# Altium PCB 剥皮器20200614.PCBDOC (part 1 of 3)
Units mm, origin at the board's own origin, x right, y up, seen from the top; angles counter-clockwise.
Board outline 140 x 88 mm, 4 copper layers (Top Layer, MidLayer1, MidLayer2, Bottom Layer); 134 components, 105 nets, 507 pads, 469 vias.
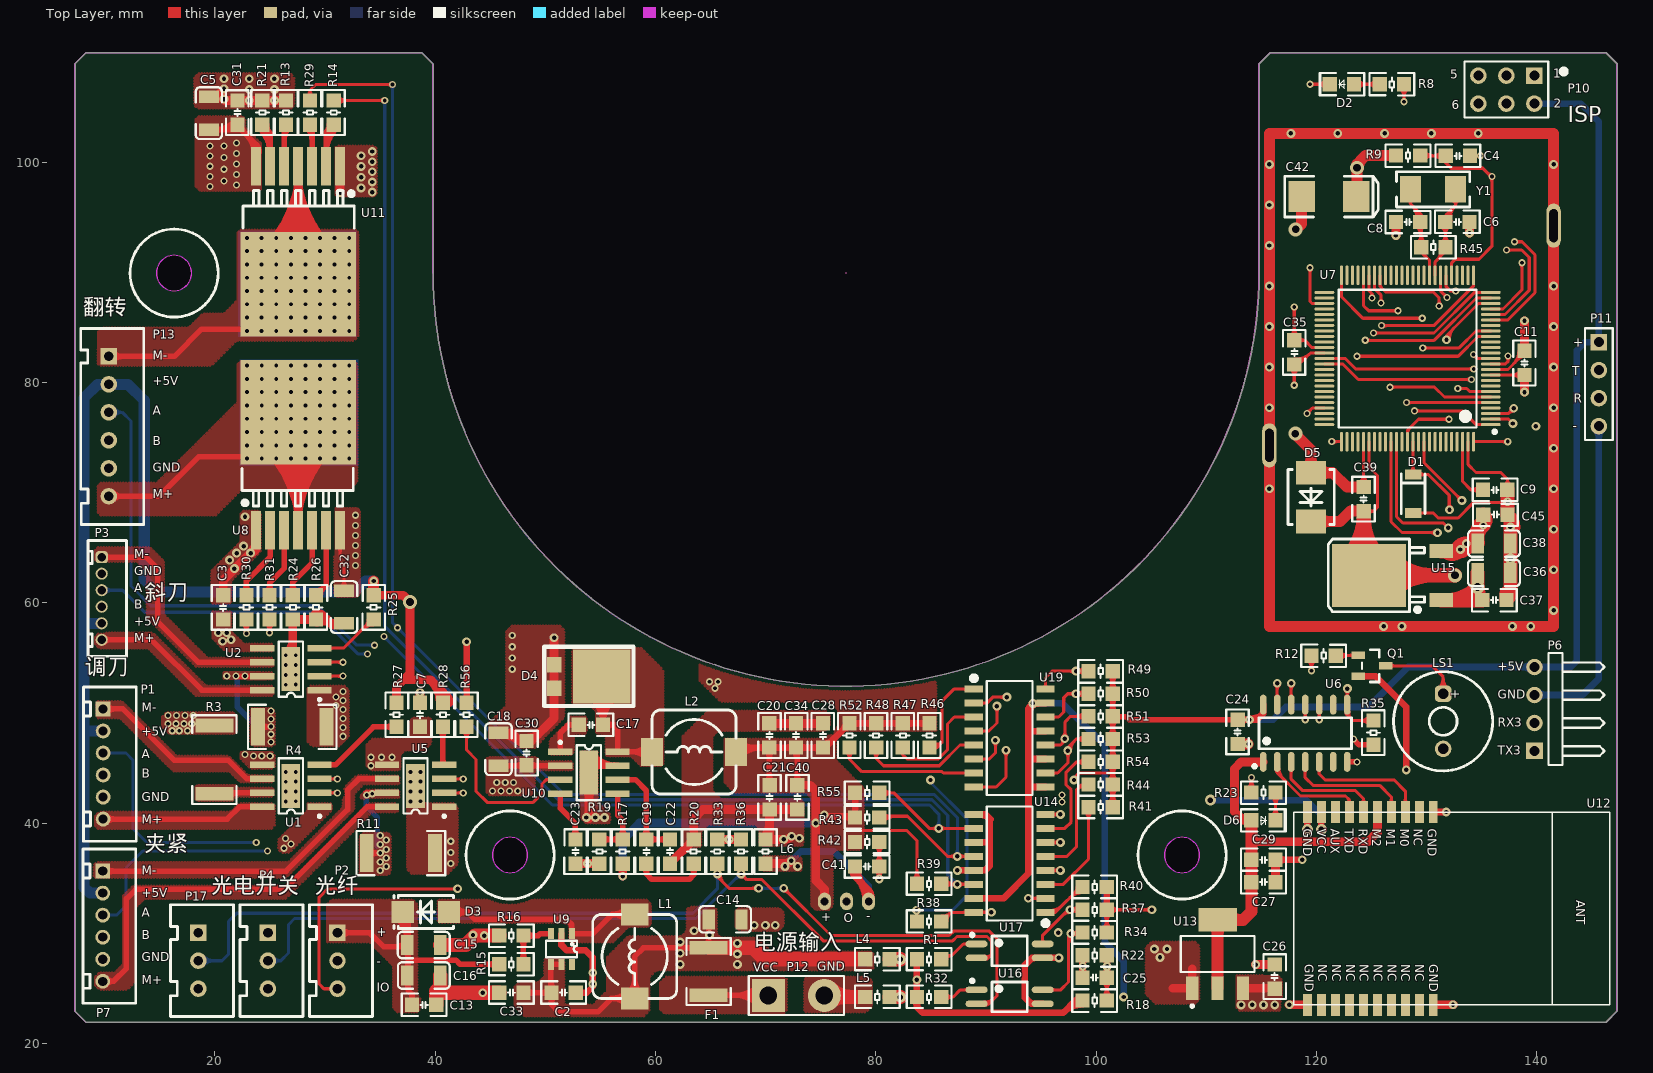
[diagram p0: Top Layer view]
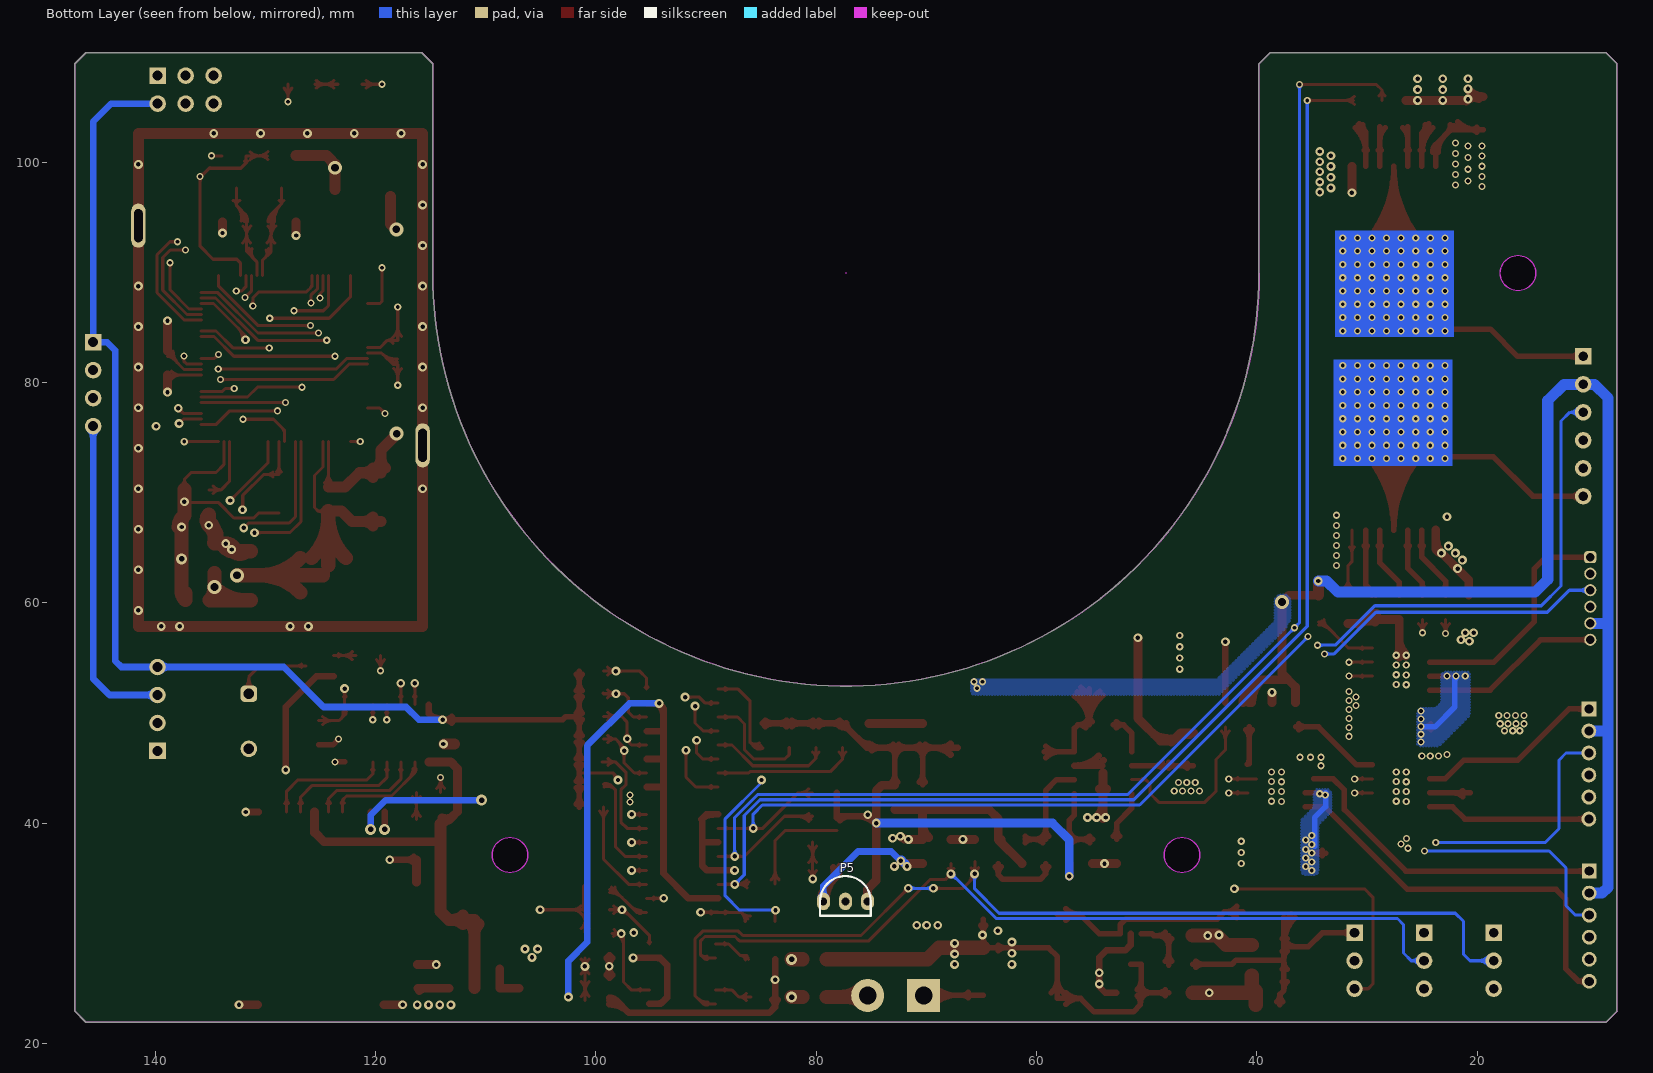
[diagram p1: Bottom Layer view, seen from below]
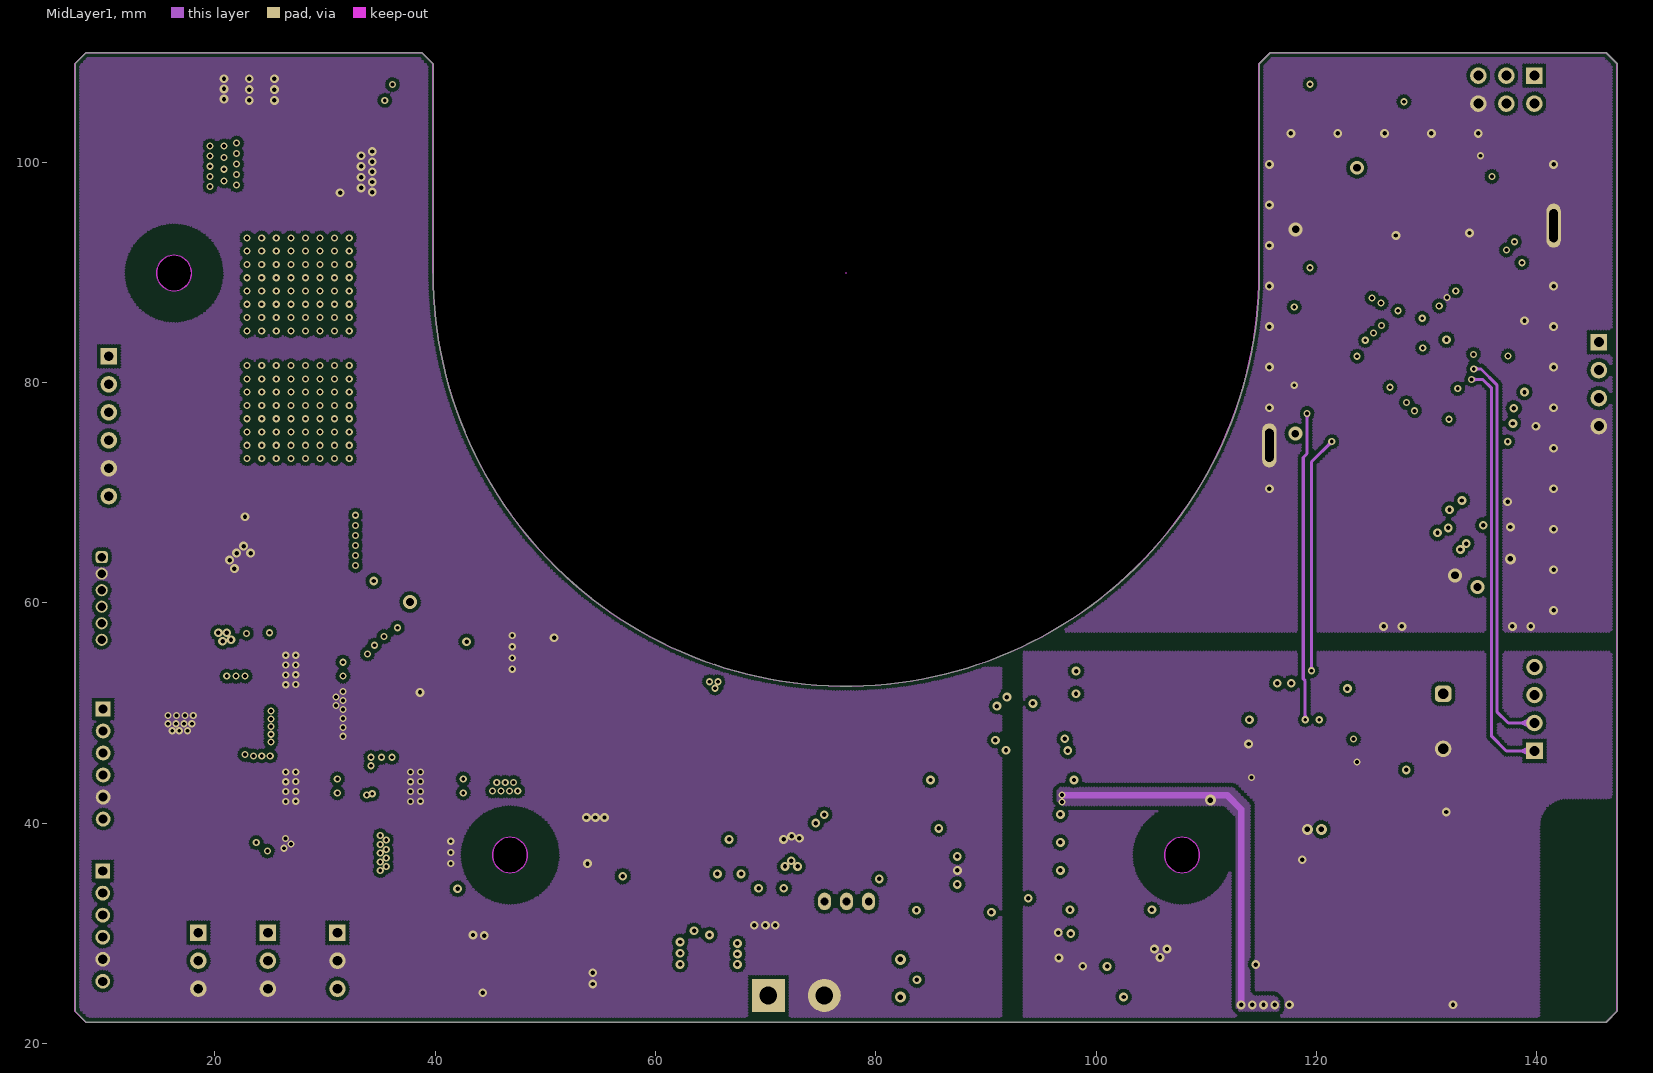
[diagram p2: MidLayer1]
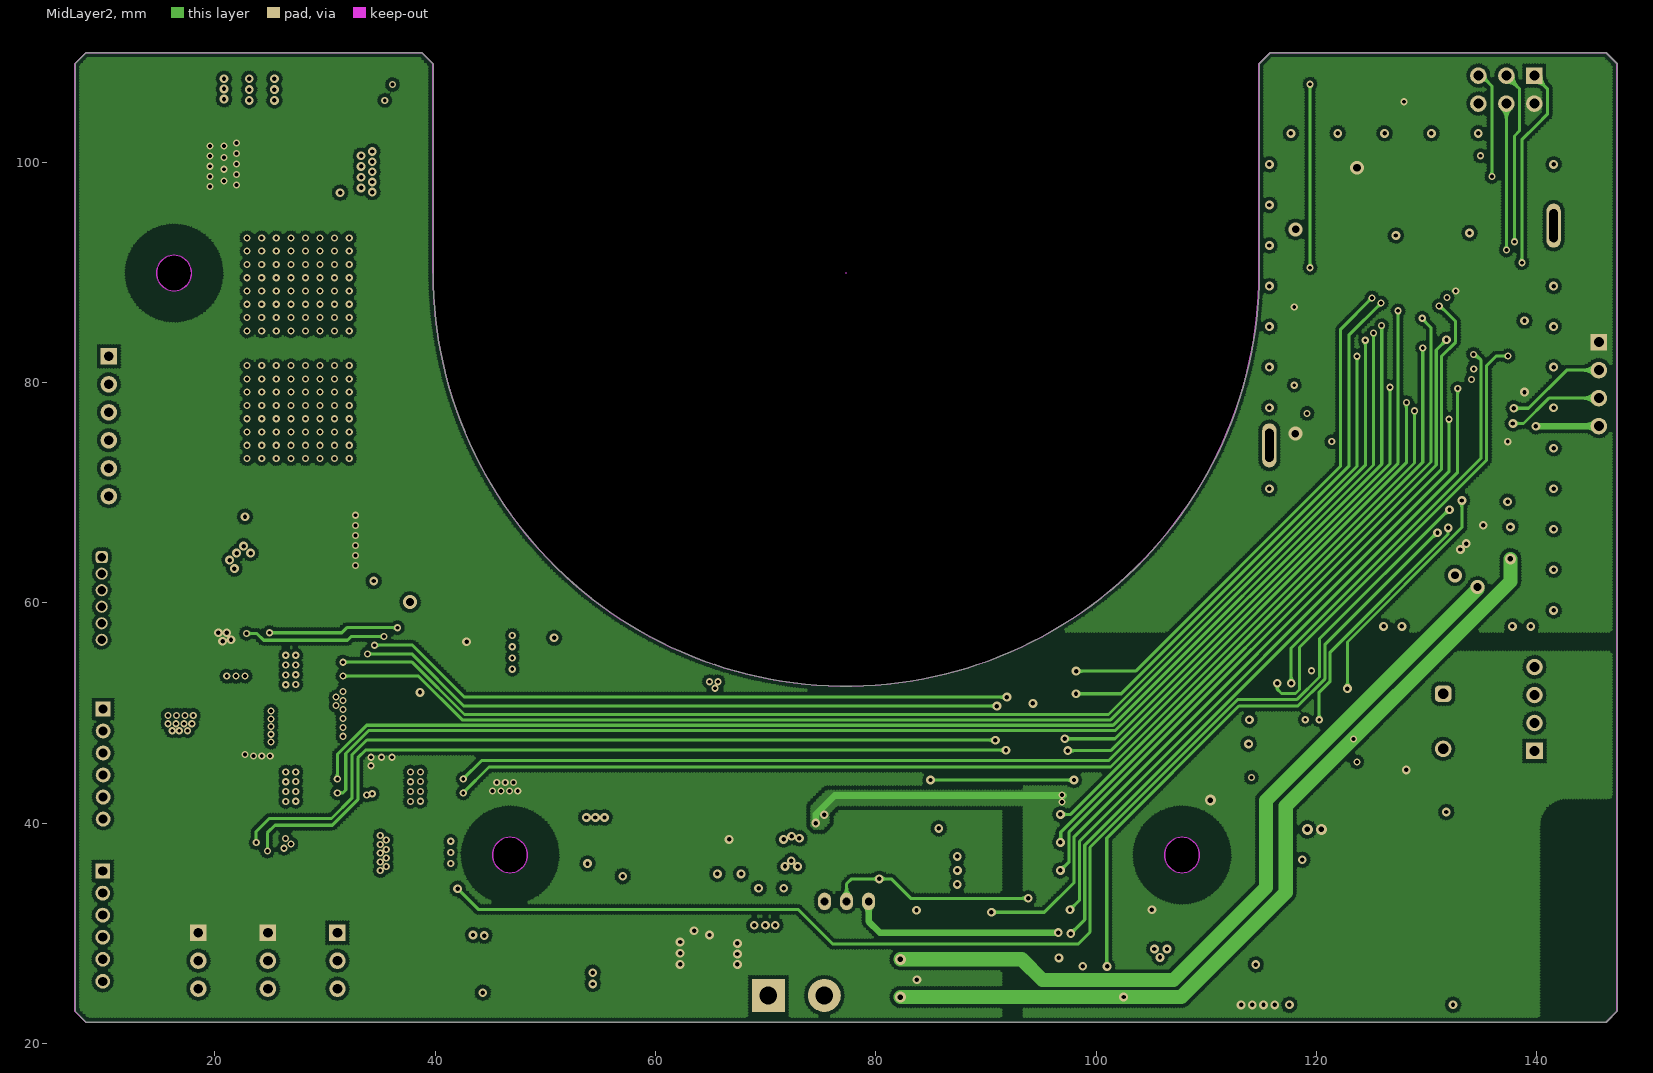
[diagram p3: MidLayer2]

## Layer stack, top to bottom
Top Layer: signal copper 0.0356
Dielectric: core 0.32, FR-4, Dk 4.8
MidLayer1: signal copper 0.0356
Dielectric: prepreg 0.32, FR-4, Dk 4.8
MidLayer2: signal copper 0.0356
Dielectric: core 0.32, FR-4, Dk 4.8
Bottom Layer: signal copper 0.0356

## Board outline
7.303,22.933 7.303,108.933 8.303,109.933 38.803,109.933 39.803,108.933 39.803,89.933 ccw(c77.303,89.933) 114.803,89.933 114.803,108.933 115.803,109.933 146.303,109.933 147.303,108.933 147.303,22.933 146.303,21.933 8.303,21.933
cut-out: 106.203,37.105 ccw(c107.803,37.105) 107.803,35.505 ccw(c107.803,37.105) 109.403,37.105 ccw(c107.803,37.105) 107.803,38.705 ccw(c107.803,37.105)
cut-out: 45.203,37.105 ccw(c46.803,37.105) 46.803,35.505 ccw(c46.803,37.105) 48.403,37.105 ccw(c46.803,37.105) 46.803,38.705 ccw(c46.803,37.105)
cut-out: 14.703,89.933 ccw(c16.303,89.933) 16.303,88.333 ccw(c16.303,89.933) 17.903,89.933 ccw(c16.303,89.933) 16.303,91.533 ccw(c16.303,89.933)

## Design rules (kind name [scope] priority, off if disabled: settings)
Clearance [All] p1: gap=0.18
FabricationTestPointUsage TestPointUsage [All] p1: valid=0 allowmultiple=FALSE
FabricationTestpoint Testpoint [All] p1: side=3 testpointundercomponent=TRUE minsize=1.016 maxsize=2.54 preferedsize=1.524 minholesize=0 maxholesize=1.016 preferedholesize=0.813 testpointgrid=0.025 allowsidetop=TRUE allowsidebottom=TRUE usegrid=TRUE gridtolerance=0
PolygonConnect PolygonConnect_1 [IsVia] p1: connectstyle=Direct reliefconductorwidth=0.254 reliefentries=4 polygonreliefangle="90 Angle"
PolygonConnect [All] p2: connectstyle=Direct reliefconductorwidth=0.35 reliefentries=4 polygonreliefangle="90 Angle"
RoutingVias [All] p1: holewidth=0.711 width=1.27 viastyle="Through Hole" minholewidth=0.711 minwidth=1.27 maxholewidth=0.711 maxwidth=1.27
SilkscreenOverComponentPads [All] p1: minsilkscreentomaskgap=0.254
SolderMaskExpansion [All] p1: expansion=0.102
Width [All] p1: maxlimit=10 minlimit=0.1 preferedwidth=0.28
25 further rules are at their usual default settings.

## Components (designator, comment, footprint, x,y, rotation, side; value= is the part's Value field where it differs from the comment)
C2 "104" 0805-C 51.659,24.61 r0 top
C3 "104" 0805-C 20.752,59.588 r90 top
C4 "104" 0805-C 132.839,100.573 r0 top
C5 "22uF/25V" 1206-C 19.456,104.445 r90 top
C6 "30pF" 0805-C 132.788,94.572 r0 top
C7 "104" 0805-C 38.618,49.839 r90 top
C8 "30pF" 0805-C 128.308,94.572 r180 top
C9 "104" 0805-C 136.22,70.256 r0 top
C11 "104" 0805-C 138.884,81.77 r90 top
C13 "104" 0805-C 39.002,23.501 r0 top
C14 "22uF/25V" 1206-C 66.315,31.264 r0 top
C15 "22uF/25V" 1206-C 38.964,28.931 r0 top
C16 "22uF/25V" 1206-C 38.966,26.168 r0 top
C17 "104" 0805-C 54.127,48.92 r0 top
C18 "22uF/25V" 1206-C 45.745,46.711 r90 top
C19 "1.2nF" 0805-C 59.17,37.421 r270 top
C20 "47uF" 0805-C 70.334,47.955 r270 top
C21 "47uF" 0805-C 70.358,42.342 r90 top
C22 "22pF" 0805-C 61.316,37.421 r270 top
C23 "8.2nF" 0805-C 52.731,37.421 r270 top
C24 "104" 0805-C 112.843,48.284 r90 top
C25 "104" 0805-C 99.864,25.964 r180 top
C26 "47uF" 0805-C 116.205,26.06 r270 top
C27 "47uF" 0805-C 115.189,34.645 r180 top
C28 "104" 0805-C 75.192,47.955 r90 top
C29 "104" 0805-C 115.189,36.677 r0 top
C30 "104" 0805-C 48.285,46.355 r270 top
C31 "104" 0805-C 22.047,104.496 r90 top
C32 "22uF/25V" 1206-C 31.725,59.614 r270 top
C33 "104" 0805-C 46.91,24.61 r0 top
C34 "47uF" 0805-C 72.751,47.955 r270 top
C35 "47uF" 0805-C 117.983,82.728 r90 top
C36 "22uF/25V" 1206-C 136.113,62.708 r0 top
C37 "104" 0805-C 136.144,60.249 r180 top
C38 "22uF/25V" 1206-C 136.113,65.375 r0 top
C39 "47uF" 0805-C 124.282,69.418 r90 top
C40 "104" 0805-C 72.873,42.342 r270 top
C41 "104" 0805-C 79.214,36.068 r180 top
C42 "100uF" LC-CASE-C_6032 121.133,96.876 r0 top
C45 "104" 0805-C 136.246,67.996 r180 top
D1 "5.1V" LC-LL-34 128.778,69.901 r270 top
D2 "红色" 0805-LED 122.311,107.072 r0 top
D3 "SS34" "SMA - JW" 39.154,31.934 r0 top
D4 "SB1045L" TO-277 52.73,53.315 r180 top
D5 "SMBJ5.0A" LC-SMB(DO-214AA)_S2 119.507,69.596 r90 top
D6 "红色" 0805-LED 115.189,40.259 r180 top
F1 "1812 5A" LC-1812_R 64.816,26.529 r90 top
L1 "4.7uH" 7*7*4电感 58.111,27.9 r90 top
L2 "6.8uh" 7*7*4电感 63.5,46.457 r0 top
L4 "0R" 0805-R#1 80.133,27.641 r180 top
L5 "0R" 0805-R#1 80.133,24.216 r180 top
L6 "0R" 0805-R#1 69.977,37.421 r90 top
LS1 "5V蜂鸣器" 蜂鸣器0905 131.496,49.241 r270 top
P1 "PH2.0-6PIN" PH2.0-6PIN 9.86,45.363 r270 top
P2 "XH2.54-3PIN直" XH2.54-3PINֱ 31.127,27.508 r270 top
P3 "ZH1.5-6PIN" ZH1.5-6PIN 9.728,60.393 r270 top
P4 "XH2.54-3PIN直" XH2.54-3PINֱ 24.816,27.508 r270 top
P5 "NC" TO-92—_三极管 77.343,32.893 r180 bottom
P6 "2.54弯单排针" HDR1X4H 139.79,46.548 r90 top
P7 "PH2.0-6PIN" PH2.0-6PIN 9.822,30.644 r270 top
P10 "2.54针" HDR2X3 139.776,107.855 r180 top
P11 "2.54单排针" HDR1X4 145.631,83.66 r270 top
P12 "焊孔2MM" HDR1X2 70.24,24.358 r0 top
P13 "XH2.54-6PIN直" XH2.54-6PINֱ 10.37,76.022 r270 top
P17 "XH2.54-3PIN直" XH2.54-3PINֱ 18.504,27.508 r270 top
Q1 "S8550" SOT--23 125.044,54.28 r180 top
R1 "2K" 0805-R#2 84.828,27.641 r0 top
R3 "0.1R 1%" 2512-R 19.964,45.771 r270 top
R4 "0.35R 1%" 2512-R 27.026,48.743 r180 top
R8 "1K" 0805-R#2 126.842,107.072 r0 top
R9 "10K" 0805-R#2 128.308,100.597 r180 top
R11 "0.1R 1%" 2512-R 36.881,37.287 r180 top
R12 "2K" 0805-R#2 120.65,55.194 r180 top
R13 "1K" 0805-R#1 26.459,104.505 r90 top
R14 "1K" 0805-R#2 30.785,104.505 r90 top
R15 "30K" 0805-R#2 46.91,27.188 r0 top
R16 "1.2K" 0805-R#2 46.91,29.791 r180 top
R17 "10.2K" 0805-R#2 57.024,37.421 r270 top
R18 "100K 1%" 0805-R#2 99.864,23.898 r180 top
R19 "2K" 0805-R#2 54.902,37.421 r90 top
R20 "44.2K" 0805-R#2 63.462,37.421 r270 top
R21 "1K" 0805-R#2 24.308,104.505 r270 top
R22 "51K 1%" 0805-R#2 99.864,28.005 r0 top
R23 "330R" 0805-R#2 115.189,42.774 r180 top
R24 "1K" 0805-R#1 27.076,59.588 r270 top
R25 "10K" 0805-R#2 34.417,59.588 r270 top
R26 "1K" 0805-R#2 29.185,59.588 r90 top
R27 "10K" 0805-R#2 36.486,49.839 r270 top
R28 "10K" 0805-R#2 40.703,49.839 r270 top
R29 "1K" 0805-R#1 28.634,104.505 r270 top
R30 "1K" 0805-R#1 22.86,59.588 r270 top
R31 "1K" 0805-R#1 24.968,59.588 r270 top
R32 "2K" 0805-R#1 84.828,24.216 r180 top
R33 "10K" 0805-R#1 65.608,37.421 r90 top
R34 "10K" 0805-R#1 99.864,30.071 r180 top
R35 "10K" 0805-R#1 125.171,48.209 r270 top
R36 "10K" 0805-R#1 67.754,37.421 r90 top
R37 "10K" 0805-R#1 99.864,32.136 r180 top
R38 "10K" 0805-R#1 84.828,31.067 r180 top
R39 "10K" 0805-R#1 84.828,34.493 r180 top
R40 "330R" 0805-R#1 99.864,34.202 r180 top
R41 "330R" 0805-R#1 100.406,41.453 r180 top
R42 "10K" 0805-R#1 79.213,38.278 r180 top
R43 "10K" 0805-R#1 79.213,40.512 r180 top
R44 "330R" 0805-R#1 100.406,43.506 r180 top
R45 "1M" 0805-R#1 130.603,92.286 r0 top
R46 "330R" 0805-R#1 84.861,47.955 r270 top
R47 "330R" 0805-R#1 82.444,47.955 r270 top
R48 "330R" 0805-R#1 80.027,47.955 r270 top
R49 "10K" 0805-R#1 100.406,53.797 r0 top
R50 "10K" 0805-R#1 100.406,51.744 r0 top
R51 "10K" 0805-R#1 100.406,49.69 r0 top
R52 "330R" 0805-R#1 77.61,47.955 r270 top
R53 "10K" 0805-R#1 100.406,47.637 r0 top
R54 "330R" 0805-R#1 100.406,45.56 r180 top
R55 "10K" 0805-R#1 79.213,42.745 r180 top
R56 "10K" 0805-R#1 42.85,49.839 r270 top
U1 "DRV8872" SOP-8带散热#1 26.899,43.383 r90 top
U2 "DRV8872" SOP-8带散热#1 26.899,53.975 r90 top
U5 "DRV8872" SOP-8带散热#1 38.213,43.383 r90 top
U6 "TXS0104EDR" LC-SOIC-14_150mil 118.974,48.158 r0 top
U7 "ATmega2560-16AU" LC-LQFP-100_14x14x05P 128.267,82.176 r90 top locked
U8 "BTS7960" LC-TO-263-7 27.559,66.599 r270 top
U9 "SX1308" SOT-23-6 51.456,28.572 r180 top
U10 "TPS54531" SOP-8带散热#2 53.95,44.577 r270 top
U11 "BTS7960" LC-TO-263-7 27.559,99.619 r90 top locked
U12 "E28-2G4T12S" E28-2G4T12S 124.892,32.258 r270 top locked
U13 "AMS1117-3.3" SOT--223 111.023,28.118 r270 top
U14 "TLP291-4" TLP291-4 92.143,36.347 r90 top
U15 "78M05" TO-252 128.041,62.459 r180 top
U16 "IS281GB" LC-SOP-4_P1.27 92.143,24.232 r0 top
U17 "IS281GB" LC-SOP-4_P1.27 92.143,28.397 r0 top
U19 "TLP291-4" TLP291-4 92.143,47.721 r270 top
Y1 "16M" LC-SMD-5032_2P 130.581,97.536 r180 top

## Footprints (in the part's own frame and the unit in brackets; to place one, negate y for a bottom-side part, rotate by r counter-clockwise, add the part's x,y. Pads: shape width x height; smd on the part's side, far side on the other; paste and mask are expansions set on the pad)
7*7*4电感 [mm] "7*7*4电感"
  rect 2x2.5 smd: 1(-3.81,0) 2(3.81,0)
  silkscreen extent -3.81,-3.81 3.81,3.81, body extent -3.65,-3.65 3.65,3.65, height 3.65
0805-C [mil] "0805贴片电容"
  rect 51x51 smd: 1(-43.31,0) 2(43.31,0)
  silkscreen extent -80,-40 80,41
0805-LED [mil] "0805LED"
  rect 51x51 smd: 1(43.31,0) 2(-43.31,0)
  silkscreen extent -81,-41 80,41
0805-R#1 [mil] "0805电阻"
  rect 51x51 smd: 1(43.31,0) 2(-43.31,0)
  silkscreen extent -80,-41 80,40
0805-R#2 [mil] "0805电阻"
  rect 51x51 smd: 1(-43.31,0) 2(43.31,0)
  silkscreen extent -80,-40 80,41
1206-C [mm]
  rect 1.13x1.8 smd: 1(-1.49,0) 2(1.49,0)
  silkscreen extent -2.36,-1.2 2.35,1.2, body extent -1.6,-0.81 1.6,0.79, height 1
2512-R [mm] "2512-R"
  rect 1.25x3.42 smd: 1(-3.1,0) 2(3.1,0)
  silkscreen extent -4.03,-2.01 4.02,2.01, body extent -3.16,-1.6 3.16,1.6, height 0.62
E28-2G4T12S [mm]
  rect 2x0.8 smd: 1(-8.75,5.715) 2(-8.75,4.445) 3(-8.75,3.175) 4(-8.75,1.905) 5(-8.75,0.635) 6(-8.75,-0.635) 7(-8.75,-1.905) 8(-8.75,-3.175) 9(-8.75,-4.445) 10(-8.75,-5.715) 11(8.75,-5.715) 12(8.75,-4.445) 13(8.75,-3.175) 14(8.75,-1.905) 15(8.75,-0.635) 16(8.75,0.635) 17(8.75,1.905) 18(8.75,3.175) 19(8.75,4.445) 20(8.75,5.715)
  silkscreen extent -8.76,-6.96 8.75,21.74
HDR1X2 [mm] "Connector; Header; 2 Position"
  rect 3x3 hole 1.6: 1(0,0)
  round 3 hole 1.6: 2(5.08,0)
  silkscreen extent -1.78,-1.78 6.86,1.78
HDR1X4 [mm] "Connector; Header; 4 Position"
  rect 1.5x1.5 hole 0.9: 1(0,0)
  round 1.5 hole 0.9: 2(2.54,0) 3(5.08,0) 4(7.62,0)
  silkscreen extent -1.27,-1.27 8.89,1.27
HDR1X4H [mm] "Connector; Header; 4 Position; Right Angle"
  rect 1.5x1.5 hole 0.9: 1(0,0)
  round 1.5 hole 0.9: 2(2.54,0) 3(5.08,0) 4(7.62,0)
  silkscreen extent -1.27,-6.35 8.89,-1.27
HDR2X3 [mm] "Connector; Header; 3x2 Position"
  rect 1.5x1.5 hole 0.9: 1(0,0)
  round 1.5 hole 0.9: 2(0,2.54) 3(2.54,0) 4(2.54,2.54) 5(5.08,0) 6(5.08,2.54)
  silkscreen extent -1.27,-1.27 6.35,3.81
LC-1812_R [mm]
  rect 1.2x3.42 smd: 1(-2.15,0) 2(2.15,0)
  silkscreen extent -3.05,-2.01 3.05,2.01, body extent -2.25,-1.6 2.25,1.6, height 0.59
LC-CASE-C_6032 [mm]
  rect 2.4x2.8 smd: 1(2.48,0) 2(-2.48,0)
  silkscreen extent -4.01,-1.85 4.47,1.85, body extent -3.05,-1.68 3.05,1.67, height 2.7
LC-LL-34 [mm]
  rect 0.9x1.5 smd: 1(1.75,0) 2(-1.75,0)
  silkscreen extent -1.8,-1.08 1.8,1.08
LC-LQFP-100_14x14x05P [mm]
  oval 0.28x1.8 smd mask+0.051: 1(-6,-7.55) 2(-5.5,-7.55) 3(-5,-7.55) 4(-4.5,-7.55) 5(-4,-7.55) 6(-3.5,-7.55) 7(-3,-7.55) 8(-2.5,-7.55) 9(-2,-7.55) 10(-1.5,-7.55) 11(-1,-7.55) 12(-0.5,-7.55) 13(0,-7.55) 14(0.5,-7.55) 15(1,-7.55) 16(1.5,-7.55) 17(2,-7.55) 18(2.5,-7.55) 19(3,-7.55) 20(3.5,-7.55) 21(4,-7.55) 22(4.5,-7.55) 23(5,-7.55) 24(5.5,-7.55) 25(6,-7.55) 51(6,7.55) 52(5.5,7.55) 53(5,7.55) 54(4.5,7.55) 55(4,7.55) 56(3.5,7.55) 57(3,7.55) 58(2.5,7.55) 59(2,7.55) 60(1.5,7.55) 61(1,7.55) 62(0.5,7.55) 63(0,7.55) 64(-0.5,7.55) 65(-1,7.55) 66(-1.5,7.55) 67(-2,7.55) 68(-2.5,7.55) 69(-3,7.55) 70(-3.5,7.55) 71(-4,7.55) 72(-4.5,7.55) 73(-5,7.55) 74(-5.5,7.55) 75(-6,7.55)
  oval 1.8x0.28 smd mask+0.051: 26(7.55,-6) 27(7.55,-5.5) 28(7.55,-5) 29(7.55,-4.5) 30(7.55,-4) 31(7.55,-3.5) 32(7.55,-3) 33(7.55,-2.5) 34(7.55,-2) 35(7.55,-1.5) 36(7.55,-1) 37(7.55,-0.5) 38(7.55,0) 39(7.55,0.5) 40(7.55,1) 41(7.55,1.5) 42(7.55,2) 43(7.55,2.5) 44(7.55,3) 45(7.55,3.5) 46(7.55,4) 47(7.55,4.5) 48(7.55,5) 49(7.55,5.5) 50(7.55,6) 76(-7.55,6) 77(-7.55,5.5) 78(-7.55,5) 79(-7.55,4.5) 80(-7.55,4) 81(-7.55,3.5) 82(-7.55,3) 83(-7.55,2.5) 84(-7.55,2) 85(-7.55,1.5) 86(-7.55,1) 87(-7.55,0.5) 88(-7.55,0) 89(-7.55,-0.5) 90(-7.55,-1) 91(-7.55,-1.5) 92(-7.55,-2) 93(-7.55,-2.5) 94(-7.55,-3) 95(-7.55,-3.5) 96(-7.55,-4) 97(-7.55,-4.5) 98(-7.55,-5) 99(-7.55,-5.5) 100(-7.55,-6)
  silkscreen extent -6.8,-8.05 6.25,6.25
LC-SMB(DO-214AA)_S2 [mm]
  rect 2.159x2.743 smd: 1(2.21,0) 2(-2.21,0)
  silkscreen extent -2.5,-2.1 2.5,2.1
LC-SMD-5032_2P [mm]
  rect 1.9x2.4 smd: 1(-2.05,0) 2(2.05,0)
  silkscreen extent -3.32,-1.6 3.32,1.6
LC-SOIC-14_150mil [mm]
  oval 0.6x1.8 smd: 1(-3.81,-2.6) 2(-2.54,-2.6) 3(-1.27,-2.6) 4(0,-2.6) 5(1.27,-2.6) 6(2.54,-2.6) 7(3.81,-2.6) 8(3.81,2.6) 9(2.54,2.6) 10(1.27,2.6) 11(0,2.6) 12(-1.27,2.6) 13(-2.54,2.6) 14(-3.81,2.6)
  silkscreen extent -4.75,-3.15 4.2,1.4
LC-SOP-4_P1.27 [mm]
  oval 2x0.6 smd: 1(-3,0.635) 2(-3,-0.635) 3(3,-0.635) 4(3,0.635)
  silkscreen extent -3.55,-1.35 1.6,1.6
LC-TO-263-7 [mm]
  rect 3.5x0.9 smd: 1(0,-3.81) 2(0,-2.54) 3(0,-1.27) 4(0,0) 5(0,1.27) 6(0,2.54) 7(0,3.81)
  rect 9.5x10.5 smd: 8(-10.7,0)
  silkscreen extent -5.6,-5.1 -2.2,5
PH2.0-6PIN [mm]
  rect 1.35x1.35 hole 0.82: 1(-5,0)
  round 1.35 hole 0.82: 2(-3,0) 3(-1,0) 4(1,0) 5(3,0) 6(5,0)
  silkscreen extent -7,-1.8 7,3
"SMA - JW" [mm] "贴片4007"
  rect 2x2 smd: 1(2.1,0) 2(-2.1,0)
  silkscreen extent -2.89,-1.5 2.5,1.5
SOP-8带散热#1 [mm] "SOP-8带散热"
  rect 0.6x2.2 smd: 1(-1.905,-2.6) 2(-0.635,-2.6) 3(0.635,-2.6) 4(1.905,-2.6) 5(1.905,2.6) 6(0.635,2.6) 7(-0.635,2.6) 8(-1.905,2.6)
  rect 4x1.7 smd: 1(0,0)
  silkscreen extent -2.88,-2.72 2.5,1.1
SOP-8带散热#2 [mm] "SOP-8带散热"
  rect 0.6x2.2 smd: 1(-1.905,-2.6) 2(-0.635,-2.6) 3(0.635,-2.6) 4(1.905,-2.6) 5(1.905,2.6) 6(0.635,2.6) 7(-0.635,2.6) 8(-1.905,2.6)
  rect 4x1.7 smd: 7(0,0)
  silkscreen extent -2.88,-2.72 2.5,1.1
SOT-23-6 [mm] "DW01"
  rect 0.55x1 smd: 1(-0.95,-1.4) 2(0,-1.4) 3(0.95,-1.39) 4(0.95,1.4) 5(0,1.4) 6(-0.95,1.4)
  silkscreen extent -1.41,-0.75 1.4,0.75
SOT--23 [mm] "贴片三极管"
  rect 1.25x0.7 smd: 1(1.25,-0.95) 2(1.25,0.95) 3(-1.25,0)
  silkscreen extent -0.65,-1.46 0.9,1.46
SOT--223 [mm] "AMS1117"
  rect 2.15x1.1 smd: 1(3.1,-2.3) 2(3.1,0) 3(3.1,2.3)
  rect 2.15x3.5 smd: 2(-3.1,0)
  silkscreen extent -1.62,-3.35 4.85,3.35
TLP291-4 [mm]
  rect 0.65x1.65 smd: 1(-4.445,-3.25) 2(-3.175,-3.25) 3(-1.905,-3.25) 4(-0.635,-3.25) 5(0.635,-3.25) 6(1.905,-3.25) 7(3.175,-3.25) 8(4.445,-3.25) 9(4.445,3.25) 10(3.175,3.25) 11(1.905,3.25) 12(0.635,3.25) 13(-0.635,3.25) 14(-1.905,3.25) 15(-3.175,3.25) 16(-4.445,3.25)
  silkscreen extent -5.63,-3.45 5.18,2.08, body extent -5.17,-3.5 5.18,3.5, height 2.3
TO-92—_三极管 [mm] "插件三极管"
  oval 1.2x1.6 hole 0.7: 1(-2,0) 2(0,0) 3(2,0)
  silkscreen extent -2.3,-1.3 2.3,2.3
TO-252 [mil] "TO-252"
  rect 85x50 smd: 1(-129.25,87.5) 3(-129.25,-87.5)
  rect 265x225 smd: 2(129.25,-1.5)
  silkscreen extent -70,-132 274,129
TO-277 [mil]
  rect 50.8x56 smd: 1(76.1,-41.6) 1(76.1,41.6)
  rect 204.72x192 smd: 3(-94.49,0)
  silkscreen extent -208,-106 112,106
XH2.54-3PINֱ [mm]
  rect 1.5x1.5 hole 0.88: 1(-2.54,0)
  round 1.5 hole 0.88: 2(0,0) 3(2.54,0)
  silkscreen extent -5.08,-2.54 5.07,3.18
XH2.54-6PINֱ [mm]
  rect 1.5x1.5 hole 0.88: 1(-6.35,0)
  round 1.5 hole 0.88: 2(-3.81,0) 3(-1.27,0) 4(1.27,0) 5(3.81,0) 6(6.35,0)
  silkscreen extent -8.89,-2.54 8.91,3.18
ZH1.5-6PIN [mm]
  rrect50% 1.1x1.1 hole 0.75: 1(-3.75,0)
  round 1.1 hole 0.75: 2(-2.25,0) 3(-0.75,0) 4(0.75,0) 5(2.25,0) 6(3.75,0)
  silkscreen extent -5.25,-1.25 5.25,2.25
蜂鸣器0905 [mm]
  rrect50% 1.5x1.5 hole 0.95: 1(-2.5,0)
  round 1.5 hole 0.95: 2(2.5,0)
  silkscreen extent -4.5,-4.5 4.5,4.5

## Part data
C2 C3 C4 C6 C7 C8 C9 C13 C17 C19 C20 C21 C22 C23 C25 C26 C27 C30 C31 C33 C34 C35 C37 C41 C45: library part Cap, "Capacitor"
C5 C11 C14 C15 C16 C18 C24 C28 C29 C32 C36 C38 C39 C40 C42: library part CAP, "Capacitor"
D1: library part "D Zener", "Zener Diode"
D2 D6: library part LED0, "Typical INFRARED GaAs LED"
D3: library part "Diode 1N4007", "1 Amp General Purpose Rectifier"
D4: library part "Diode 1N4001", "1 Amp General Purpose Rectifier"
D5: library part TVS, "TVS"
F1: library part "Fuse 1", "Fuse"
L1 L2 L4 L5 L6: library part Inductor, "Inductor"
LS1: library part Bell, "Electrical Bell"
P1: library part "Header 6", "Header, 6-Pin"
P2 P4 P5 P6 P17: library part "Header 3", "Header, 3-Pin"
P3 P7 P13: library part "Header 2", "Header, 2-Pin"
P10: library part "Header 3X2", "Header, 3-Pin, Dual row"
P11 P12: library part "Header 4", "Header, 4-Pin"
Q1: library part 2N3906, "PNP General Purpose Amplifier"
R1 R3 R4 R8 R9 R11 R12 R13 R14 R15 R16 R17 R18 R19 R20 R21 R22 R23 R24 R25 R26 R27 R28 R29 R30 R31 R32 R33 R34 R35 R36 R37 R38 R39 R40 R41 R42 R43 R44 R45 R46 R47 R48 R49 R50 R51 R52 R53 R54 R55 R56: library part Res2, "Resistor"
U1 U2 U5 U14: library part 6N137, "6N137"
U7: library part "Arduino MEGA 2560"
U8: library part ADS1115, "ADS1115"
U12: library part E43-433T13S
U13: library part AS1117
U15: library part "Volt Reg", "Voltage Regulator"
U16 U17 U19: library part TLP521-1
Y1: library part XTAL, "Crystal Oscillator"

## Free pads (board coordinates)
  oval 1.3x4 hole 0.762 slot 3 at 90 deg: 0(115.723,74.295) 0(141.525,94.234)

## Via types
v1: diameter 0.65, hole 0.35, Top Layer to Bottom Layer, 296 vias
v2: diameter 0.8, hole 0.4, Top Layer to Bottom Layer, 161 vias
v3: diameter 1.27, hole 0.711, Top Layer to Bottom Layer, 6 vias
v4: diameter 1, hole 0.5, Top Layer to Bottom Layer, 6 vias

## Nets (pads, with @x,y where several pads share a name; then routed paths per layer and width w, separated by ;. In a path a pad name is that pad's centre, name@x,y a point inside that pad or via, vN(x,y) a via of type N, cw(c..) or ccw(c..) an arc to the next point about the centre after c; other vN are vias at no path point)
+3.3V: C27.2 C29.1 D6.1 U6.1 U12.5 U13.2 | length 44.7
  Top Layer w0.8: 112.924,40.68 ccw(c113.597,41.353) D6.1@113.987,40.485 ; D6.1@113.755,40.259 113.345,40.259 112.552,41.052 112.552,44.927 113.183,45.558 U6.1@115.164,45.558 ; 114.089,38.312 124.68,38.312 125.527,39.159 U12.5@125.527,41.008
  Top Layer w1.1: U13.2@110.652,30.847 cw(c109.756,29.95) 111.023,29.95 cw(c112.291,29.95) U13.2@111.395,30.847 ; U13.2@111.023,25.018 U13.2@111.023,30.871 ; U13.2@111.023,31.218 113.344,31.218 114.089,31.963 114.089,39.925 D6.1@113.755,40.259 ; U13.2@112.07,30.847 cw(c112.966,29.95) 112.966,31.218 cw(c112.966,32.485) U13.2@112.07,31.589
+5V: C20.2 C21.2 C26.2 C28.1 C34.2 C40.1 L2.2 P1.2 P3.5 P5.3 P7.2 P13.2 Q1.2 R17.2 R25.1 R27.1 R28.1 R34.2 R37.2 R39.1 R40.2 R42.1 R43.1 R46.2 R47.2 R48.2 R52.2 R55.1 U12.9 U13.3 | length 324
  Top Layer w0.28: 78.105,39.327 82.816,39.327 83.728,38.415 R39.1@83.728,34.493 ; R39.1@83.369,34.852 ccw(c82.503,35.719) 83.728,35.719 ccw(c84.954,35.719) R39.1@84.087,34.852 ; R34.2@100.605,30.43 ccw(c99.738,31.297) 100.964,31.297 ccw(c102.189,31.297) R34.2@101.323,30.43 ; R37.2@100.605,31.777 cw(c99.738,30.911) 100.964,30.911 cw(c102.189,30.911) 101.323,31.777 cw(c102.189,30.911) 102.189,32.136 cw(c102.189,33.362) R37.2@101.323,32.495 ; R34.2@100.964,30.071 R37.2@100.964,32.136 v2(105.057,32.136) ; v2@104.873,31.953 ccw(c104.429,31.509) 104.429,32.136 ccw(c104.429,32.764) v2@104.873,32.32
  Top Layer w0.5: C20.2@70.053,46.574 cw(c69.374,45.895) 70.334,45.895 cw(c71.294,45.895) C20.2@70.615,46.574 ; C21.2@70.077,43.723 ccw(c69.456,44.344) 70.334,44.344 ; C21.2@70.334,43.466 C20.2@70.334,46.855 ; 70.334,44.46 ccw(c71.376,44.46) C21.2@70.639,43.723 ; C34.2@72.47,46.574 cw(c71.498,45.602) 72.873,45.602 ; C40.1@72.591,43.723 ccw(c71.912,44.402) 72.873,44.402 ccw(c73.833,44.402) C40.1@73.154,43.723 ; C40.1@72.873,43.442 C34.2@72.873,46.855 ; 72.873,46.188 cw(c73.418,46.188) C34.2@73.032,46.574
  Top Layer w0.6: L2.2@67.167,46.855 C20.2@70.334,46.855 75.392,46.855 R52.2@77.286,48.749 ; L2.2@67.805,46.212 cw(c69.359,44.658) 69.359,46.855 ; L2.2@67.805,47.202 ccw(c68.641,48.038) 68.641,46.855 ; C20.2@70.088,46.609 ccw(c69.495,46.016) 69.495,46.855 ccw(c69.495,47.695) C20.2@70.088,47.101 ; C20.2@70.58,46.609 cw(c71.173,46.016) 71.173,46.855 cw(c71.173,47.695) C20.2@70.58,47.101 ; C34.2@72.505,46.609 ccw(c71.912,46.016) 71.912,46.855 ccw(c71.912,47.695) C34.2@72.505,47.101 ; C34.2@72.997,46.609 cw(c73.591,46.016) 73.591,46.855 cw(c73.591,47.695) C34.2@72.997,47.101 ; v2@74.614,39.934 cw(c76.281,38.267) 76.281,40.625 ; 74.623,40.625 R43.1@78.113,40.625 ; C28.1@74.947,46.609 ccw(c74.353,46.016) 74.353,46.855 ccw(c74.353,47.695) C28.1@74.947,47.101 ; C28.1@75.192,47.203 ccw(c75.192,48.525) 76.127,47.59 ; R52.2@76.986,48.449 cw(c77.61,47.826) R52.2@77.61,48.707 ; 77,40.625 cw(c77,39.399) R43.1@77.868,40.266 ; R52.2@77.029,48.492 ccw(c76.465,49.055) R52.2@77.262,49.055 ; R52.2@77.61,49.055 R46.2@84.861,49.055 ; R52.2@77.856,48.809 cw(c78.449,48.216) 78.449,49.055 cw(c78.449,49.895) R52.2@77.856,49.301 ; R43.1@78.113,40.511 R55.1@78.113,42.745 ; R48.2@79.781,48.809 ccw(c79.187,48.216) 79.187,49.055 ccw(c79.187,49.895) R48.2@79.781,49.301 ; R48.2@80.273,48.809 cw(c80.866,48.216) 80.866,49.055 cw(c80.866,49.895) R48.2@80.273,49.301 ; R47.2@82.198,48.809 ccw(c81.605,48.216) 81.605,49.055 ccw(c81.605,49.895) R47.2@82.198,49.301 ; R47.2@82.69,48.809 cw(c83.284,48.216) 83.284,49.055 cw(c83.284,49.895) R47.2@82.69,49.301 ; R46.2@84.616,48.809 ccw(c84.022,48.216) 84.022,49.055 ccw(c84.022,49.895) R46.2@84.616,49.301 ; R37.2@100.964,32.136 R40.2@100.964,34.202 ; v4(120.447,39.424) U12.9@120.447,41.008 ; Q1.2@123.794,53.33 125.359,53.33 128.143,50.546 v2(128.143,44.831)
  Top Layer w0.8: R25.1@34.417,60.688 37.102,60.688 v3(37.719,60.071) 37.719,53.594 36.486,52.361 R27.1@36.486,50.939 ; 37.148,53.023 39.56,53.023 40.703,51.88 R28.1@40.703,50.939 ; 39.614,52.969 cw(c37.584,50.939) R28.1@40.455,50.939 ; 40.98,51.603 cw(c40.316,50.939) R28.1@41.255,50.939 ; v2(57.024,35.18) R17.2@57.024,36.321 ; C40.1@72.873,43.442 74.033,43.442 74.543,42.932 74.543,34.804 75.343,34.004 P5.3@75.343,32.893 ; U13.3@113.323,25.018 C26.2@116.148,25.018 ; 115.468,25.018 cw(c115.468,24.224) C26.2@116.03,24.785
  Top Layer w1: R25.1@34.417,60.688 v2(34.417,61.976)
  MidLayer1 w0.6: v1@96.963,42.54 111.879,42.54 113.157,41.262 v2(113.157,23.495)
  MidLayer2 w0.6: v2(74.543,40.005) 74.543,40.784 76.271,42.512 v1@97.047,42.512
  Bottom Layer w0.6: v4(110.363,42.087) 119.076,42.087 120.447,40.716 v4(120.447,39.424)
  Bottom Layer w0.8: v2(57.024,35.18) 57.024,38.482 58.547,40.005 v2(74.543,40.005)
  Bottom Layer w1: 8.152,48.363 P1.2@9.86,48.363 ; 8.232,58.143 P3.5@9.728,58.143 ; P7.2@9.822,33.644 8.647,33.644 8.128,34.163 8.128,78.613 9.347,79.832 12.116,79.832 13.589,78.359 13.589,62.103 14.732,60.96 32.639,60.96 33.655,61.976 v2(34.417,61.976)
  other v1: 96.901,41.91 96.901,42.545 65.405,52.247 64.897,52.832 65.659,52.832
  other v2: 114.173,23.495 115.189,23.495 116.205,23.495 75.311,40.767
+5VV: C11.1 C24.2 C35.2 C38.1 C39.2 C42.1 C45.2 D5.1 P6.4 P10.2 P11.1 R8.2 R9.2 R38.1 R41.2 R44.2 R49.1 R50.1 R51.1 R53.1 R54.2 U6.14 U7.10 U7.31 U7.61 U7.80 U7.100 U15.3 | length 252.4
  Top Layer w0.28: R38.1@83.728,31.067 v2@83.728,32.042 ; v2(97.984,43.913) 97.984,44.086 98.461,44.563 ; v2@98.242,43.941 cw(c99,44.024) 98.461,44.563 ; 101.506,44.563 98.461,44.563 ; C35.2@117.624,84.187 ccw(c116.757,85.054) 117.983,85.054 ccw(c119.209,85.054) C35.2@118.342,84.187 ; v1@117.852,86.706 cw(c117.536,86.39) 117.983,86.39 cw(c118.43,86.39) v1@118.114,86.706 ; v1(117.983,86.837) C35.2@117.983,83.828 118.92,83.828 ; C35.2@118.408,83.55 cw(c118.92,83.217) 118.92,83.828 ; C35.2@118.408,84.105 ccw(c118.92,84.439) 118.92,83.828 ; U7.61@120.717,83.176 119.572,83.176 118.92,83.828 ; C39.2@123.923,70.877 ccw(c123.094,71.706) 124.267,71.706 ; C39.2@124.267,70.534 U7.80@124.267,74.626 ; 124.267,71.782 ccw(c125.546,71.782) C39.2@124.641,70.877 ; R8.2@127.583,106.713 cw(c126.717,105.847) 127.942,105.847 cw(c129.168,105.847) R8.2@128.301,106.713 ; v1@127.811,105.612 ccw(c127.496,105.928) 127.942,105.928 ccw(c128.389,105.928) v1@128.073,105.612 ; v1(127.942,105.481) R8.2@127.942,107.072 ; U7.31@131.767,89.726 131.767,88.684 132.139,88.311 v1(132.647,88.311) ; v1@132.516,88.181 ccw(c132.2,87.865) 132.2,88.311 ccw(c132.2,88.758) v1@132.516,88.442 ; U7.100@134.267,74.626 v1(137.358,74.626) ; U7.10@135.817,80.676 C11.1@138.877,80.676 ; v1@137.228,74.496 ccw(c136.912,74.18) 136.912,74.626 ccw(c136.912,75.073) v1@137.228,74.757 ; 137.643,80.676 cw(c137.643,79.429) C11.1@138.525,80.311 ; 137.674,80.676 ccw(c137.674,81.88) C11.1@138.525,81.029
  Top Layer w0.5: R41.2@101.225,41.734 ccw(c100.546,42.413) 101.506,42.413 ccw(c102.466,42.413) R41.2@101.787,41.734 ; R44.2@101.225,43.225 cw(c100.546,42.546) 101.506,42.546 cw(c102.466,42.546) R44.2@101.787,43.225 ; R44.2@101.225,43.787 ccw(c100.546,44.466) 101.506,44.466 ccw(c102.466,44.466) R44.2@101.787,43.787 ; R54.2@101.225,45.278 cw(c100.546,44.599) 101.506,44.599 cw(c102.466,44.599) R54.2@101.787,45.278 ; R54.2@101.225,45.841 ccw(c100.546,46.52) 101.506,46.52 ccw(c102.466,46.52) R54.2@101.787,45.841 ; R53.1@101.225,47.356 cw(c100.546,46.677) 101.506,46.677 cw(c102.466,46.677) R53.1@101.787,47.356 ; R53.1@101.225,47.918 ccw(c100.546,48.597) 101.506,48.597 ccw(c102.466,48.597) R53.1@101.787,47.918 ; R51.1@101.225,49.409 cw(c100.546,48.73) 101.506,48.73 cw(c102.466,48.73) R51.1@101.787,49.409 ; R51.1@101.225,49.972 ccw(c100.546,50.651) 101.506,50.651 ccw(c102.466,50.651) R51.1@101.787,49.972 ; R50.1@101.225,51.463 cw(c100.546,50.784) 101.506,50.784 cw(c102.466,50.784) R50.1@101.787,51.463 ; R50.1@101.225,52.025 ccw(c100.546,52.704) 101.506,52.704 ccw(c102.466,52.704) R50.1@101.787,52.025 ; R49.1@101.225,53.516 cw(c100.546,52.837) 101.506,52.837 cw(c102.466,52.837) R49.1@101.787,53.516 ; R41.2@101.506,41.453 R49.1@101.506,53.797 ; R51.1@101.506,49.657 102.743,49.657 103.016,49.384 C24.2@112.843,49.384
  Top Layer w0.6: C24.2@112.843,49.384 114.608,49.384 U6.14@115.164,49.94 ; C24.2@113.089,49.138 cw(c113.683,48.545) 113.683,49.384 cw(c113.683,50.224) C24.2@113.089,49.63 ; v2@113.918,49.484 ccw(c114.05,51.054) U6.14@115.164,49.94 ; 115.009,49.785 ccw(c114.636,50.158) U6.14@115.164,50.158 ; U6.14@115.164,50.758 U6.14@115.164,49.94
  Top Layer w0.8: v2(138.884,79.128) C11.1@138.884,80.67
  Top Layer w1: v3@118.075,75.286 119.507,73.854 D5.1@119.507,71.806 121.471,71.806 122.759,70.518 C39.2@124.282,70.518 ; D5.1@119.097,72.216 ccw(c118.108,73.205) 119.507,73.205 ccw(c120.906,73.205) D5.1@119.917,72.216 ; D5.1@120.209,71.396 cw(c121.198,70.407) 121.198,71.806 cw(c121.198,73.205) D5.1@120.209,72.216 ; C42.1@123.664,97.536 123.664,99.81 124.451,100.597 R9.2@127.208,100.597 ; v3@123.799,99.492 cw(c124.893,99.492) 124.119,100.265
  Top Layer w1.295: U15.3@131.324,64.681 v2@132.908,64.681 ; U15.3@131.76,64.672 ccw(c132.329,65.26) v2@132.908,64.681 ; U15.3@131.768,64.668 ccw(c131.889,67.089) v2(133.602,65.375) ; 132.524,64.681 ccw(c132.524,66.453) v2@133.777,65.2 ; v2@132.861,64.977 cw(c133.602,64.486) v2(133.602,65.375) ; v2@132.892,65.016 cw(c133.76,64.148) v2@133.76,65.375 ; v2@133.092,64.865 cw(c134.529,63.427) C38.1@134.627,65.458 ; v2@133.695,65.146 ccw(c133.138,66.522) 134.623,66.522 ; v2@133.828,65.272 cw(c132.908,65.692) v2@132.908,64.681 ; C38.1@134.541,65.71 cw(c136.302,65.71) v2@135.057,66.956 ; C38.1@134.557,65.661 cw(c135.093,66.053) 134.623,66.522 ; v2@135.099,66.998 ccw(c134.575,67.522) C45.2@135.146,67.996 v2(135.146,67.045) 134.623,66.522 ; v2@132.908,64.681 v2(133.602,65.375) ; v2(133.602,65.375) C38.1@134.623,65.375 134.623,66.522 ; 134.623,66.382 cw(c135.808,66.382) 134.97,67.22 ccw(c135.808,66.382) 134.623,66.382
  MidLayer2 w0.28: v2(84.963,43.913) v2(97.984,43.913) ; 97.322,43.899 ccw(c97.322,44.575) v2@97.8,44.097 ; 97.39,43.899 cw(c97.39,43.32) v2@97.8,43.73
  Bottom Layer w0.28: v2(83.693,32.099) 86.963,32.099 88.265,33.401 88.265,40.386 84.963,43.688 v2(84.963,43.913)
  Bottom Layer w0.6: v2(113.91,49.384) 116.059,49.384 117.221,50.546 124.714,50.546 128.336,54.168 143.068,54.168 143.637,54.737 143.637,82.931 144.366,83.66 P11.1@145.631,83.66 145.631,103.67 143.986,105.315 P10.2@139.776,105.315 ; P6.4@139.472,53.85 ccw(c138.704,53.082) 138.704,54.168 ccw(c138.704,55.255) P6.4@139.472,54.487
  other v2: 133.068,64.841
  other v3: 118.075,75.349 123.664,99.492
+15V: C13.1 C15.1 C16.1 D3.2 P2.1 R15.1 | length 38.6
  Top Layer w0.5: P2.1@31.127,30.048 34.051,30.048 35.318,28.781 C15.1@37.476,28.781 ; P2.1@31.481,29.695 cw(c32.334,28.841) 32.334,30.048 cw(c32.334,31.255) P2.1@31.481,30.402 ; 36.351,28.781 ccw(c36.351,30.053) C15.1@37.251,29.153 ; D3.2@36.524,31.403 cw(c34.07,28.95) C15.1@37.54,28.95 ; D3.2@36.877,31.757 cw(c35.277,30.157) 37.54,30.157 ; C15.1@37.251,28.373 cw(c36.553,27.675) 37.54,27.675 ; C15.1@37.251,29.488 ccw(c36.553,30.186) 37.54,30.186 ; C16.1@37.253,25.61 cw(c36.56,24.917) 37.54,24.917 ; C16.1@37.253,26.726 ccw(c36.56,27.418) 37.54,27.418 ; 37.54,25.227 cw(c38.081,25.227) C16.1@37.699,25.61 ; 37.54,27.108 ccw(c38.081,27.108) C16.1@37.699,26.726 ; 37.54,27.567 41.88,27.567 42.259,27.188 R15.1@45.81,27.188 ; 37.54,27.995 cw(c38.074,27.995) C15.1@37.696,28.373 ; 37.54,29.866 ccw(c38.074,29.866) C15.1@37.696,29.488 ; D3.2@37.54,31.448 37.54,24.816 37.902,24.454 ; C13.1@37.622,23.783 ccw(c36.957,24.454) 37.902,24.454 ; C13.1@37.902,23.501 37.902,24.454 ; C13.1@38.181,23.783 cw(c38.846,24.454) 37.902,24.454 ; R15.1@45.528,26.907 ccw(c44.849,26.228) 44.849,27.188 ccw(c44.849,28.149) R15.1@45.528,27.47
ADC8: D1.2 P2.3 U7.89 | length 150.2
  Top Layer w0.28: P2.3@31.127,24.968 29.896,24.968 29.464,25.4 29.464,33.274 30.226,34.036 v2(42.037,34.036) ; D1.2@128.559,71.87 ccw(c128.057,72.372) 128.767,72.372 ; D1.2@128.767,71.662 U7.89@128.767,74.626 ; 128.767,72.427 ccw(c129.554,72.427) D1.2@128.997,71.87 ; D1.2@128.778,71.651 130.152,71.651 132.054,69.749 v2@132.054,68.454 ; D1.2@129.297,71.432 cw(c129.826,70.902) 129.826,71.651 cw(c129.826,72.399) D1.2@129.297,71.87 ; v2@131.891,68.638 ccw(c131.498,69.031) 132.054,69.031 ; 132.054,69.132 ccw(c132.753,69.132) v2@132.259,68.638
  MidLayer2 w0.28: v2(42.037,34.036) 43.9,32.173 72.932,32.173 76.075,29.03 98.37,29.03 99.443,30.103 99.443,37.796 112.881,51.234 118.243,51.234 120.28,53.271 120.28,56.743 131.991,68.454 v2(132.075,68.454) ; 131.488,67.951 cw(c132.075,67.364) v2@132.075,68.194 ; 131.691,68.154 ccw(c131.39,68.454) v2@131.815,68.454
ADC12: C25.1 R18.1 R22.2 U7.85 | length 83.3
  Top Layer w0.28: R18.1@100.605,24.257 ccw(c99.679,25.183) 100.988,25.183 ; C25.1@100.605,25.605 cw(c99.679,24.679) 100.988,24.679 ; C25.1@100.605,26.323 ccw(c99.679,27.248) v2@100.988,27.248 ; R22.2@100.605,27.646 cw(c99.679,26.721) v2@100.988,26.721 ; v2@100.804,26.814 cw(c100.36,26.37) 100.988,26.37 cw(c101.616,26.37) v2@101.172,26.814 ; v2@100.804,27.181 ccw(c100.36,27.625) 100.988,27.625 ccw(c101.616,27.625) v2@101.172,27.181 ; R18.1@100.988,23.923 R22.2@100.988,27.756 ; 100.988,24.797 cw(c102.13,24.797) C25.1@101.323,25.605 ; 100.988,25.065 ccw(c102.13,25.065) R18.1@101.323,24.257 ; v2@100.988,26.839 cw(c102.13,26.839) R22.2@101.323,27.646 ; v2@100.988,27.131 ccw(c102.13,27.131) C25.1@101.323,26.323 ; U7.85@126.767,74.626 126.767,67.371 127.756,66.382 v2@130.983,66.382 ; 130.305,66.382 cw(c130.305,65.683) v2@130.799,66.177 ; 130.406,66.382 ccw(c130.406,66.938) v2@130.799,66.545
  MidLayer2 w0.28: v2@100.804,27.181 ccw(c100.428,27.557) 100.96,27.557 ; v2@100.96,26.997 100.96,38.634 112.951,50.625 118.313,50.625 120.76,53.072 120.76,56.201 130.92,66.361 v2(130.983,66.361) ; 100.96,27.693 ccw(c101.683,27.693) v2@101.172,27.181 ; 130.432,65.873 cw(c130.983,65.321) v2@130.983,66.101 ; 130.584,66.025 ccw(c130.247,66.361) v2@130.723,66.361
  other v2: 100.988,26.997
AGND: C24.1 C25.2 C26.1 C27.1 C29.2 C41.2 L6.2 LS1.2 P5.1 R22.1 R23.2 U6.7 U12.1 U12.10 U12.11 U12.20 U13.1 U16.3 U17.3 | length 83.7
  Top Layer w0.28: R23.2@113.73,43.133 ccw(c112.863,43.999) 114.089,43.999 ccw(c115.315,43.999) R23.2@114.448,43.133 ; v1@113.958,44.015 cw(c113.642,43.699) 114.089,43.699 cw(c114.536,43.699) v1@114.22,44.015 ; R23.2@114.089,42.774 v1(114.089,44.146)
  Top Layer w0.5: U6.7@122.784,45.558 v1(123.663,45.558)
  Top Layer w0.6: C41.2@77.868,35.822 cw(c77.274,35.229) 78.114,35.229 cw(c78.953,35.229) C41.2@78.359,35.822 ; C41.2@77.869,36.13 ccw(c78.885,35.872) 78.144,35.13 ; 78.114,35.16 79.343,33.931 P5.1@79.343,32.893 ; 78.238,35.036 cw(c76.296,33.093) P5.1@79.043,33.093 ; C41.2@78.45,35.982 ccw(c80.073,35.569) 78.889,34.385 ; P5.1@79.131,33.305 ccw(c78.619,33.817) 79.343,33.817 ccw(c80.067,33.817) P5.1@79.555,33.305 ; 79.263,34.011 cw(c78.344,33.093) P5.1@79.643,33.093 ; 93.848,23.843 ccw(c94.443,24.439) U16.3@94.443,23.597 ; 93.975,27.568 cw(c94.443,27.101) U17.3@94.443,27.762 ; U16.3@95.143,23.597 94.094,23.597 93.533,24.158 93.533,27.126 94.169,27.762 v2@96.654,27.762 ; C25.2@98.518,26.21 ccw(c97.924,26.803) 98.764,26.803 ccw(c99.603,26.803) C25.2@99.009,26.21 ; R22.1@98.518,27.76 cw(c97.924,27.166) 98.764,27.166 cw(c99.603,27.166) R22.1@99.009,27.76 ; C25.2@98.764,25.964 R22.1@98.764,28.005 ; C29.2@116.289,36.677 v2@118.744,36.677 ; C29.2@116.535,36.431 cw(c117.128,35.837) 117.128,36.677 cw(c117.128,37.516) C29.2@116.535,36.923 ; v4(119.177,39.424) U12.10@119.177,41.008 ; U12.1@130.607,41.008 v2@131.852,41.008
  Top Layer w0.8: L6.2@70.334,36.321 v2@71.937,36.321 ; 71.145,36.321 cw(c71.145,35.458) v2(71.755,36.068) ; v2@71.71,36.321 ccw(c71.71,37.192) v2(72.326,36.576) ; 106.983,25.018 U13.1@108.723,25.018 108.723,26.758 ; v2@114.465,27.16 C26.1@116.205,27.16 ; C27.1@116.289,34.645 C29.2@116.289,36.677 ; v2@117.513,23.508 U12.11@119.253,23.508 ; U12.20@130.683,23.508 v2@132.423,23.508
  Top Layer w1: C24.1@112.843,47.184 v2@113.785,47.184
  MidLayer2 w0.6: P5.1@79.131,32.481 cw(c78.619,31.969) 79.343,31.969 cw(c80.067,31.969) P5.1@79.555,32.481 ; P5.1@79.343,32.893 79.343,31.075 80.353,30.065 v2(96.563,30.065)
  Bottom Layer w0.6: v2(72.326,36.576) 73.177,37.426 76.205,37.426 79.343,34.288 P5.1@79.343,32.893 ; P5.1@79.131,33.305 ccw(c78.619,33.817) 79.343,33.817 ccw(c80.067,33.817) P5.1@79.555,33.305
  Bottom Layer w0.8: v2@71.937,36.321 v2@72.259,36.643
  other v2: 117.541,23.508 132.395,23.508 98.783,27.003 114.493,27.16 96.612,27.762 105.791,27.813 105.283,28.575 106.426,28.575 72.898,36.068 118.702,36.677 131.781,41.008 113.836,47.184
GND: C2.2 C3.2 C5.2 C7.2 C13.2 C14.2 C15.2 C16.2 C18.2 C20.1 C21.1 C22.2 C23.2 C28.2 C30.1 C31.2 C32.2 C33.1 C34.1 C40.2 D4.1 L5.1 L6.1 P1.5 P2.2 P3.2 P4.3 P7.5 P12.2 P13.5 P17.3 R3.1 R4.1 R11.1 R13.1 R16.2 R19.1 R20.1 R21.1 R24.1 R26.1 U1.1 U2.1 U5.1 U8.1 U9.2 U10.7 U11.1 U14.9 U14.11 U14.13 | length 143.1
  Top Layer w0.6: U9.2@51.456,29.972 51.456,28.935 51.943,28.448 53.666,28.448 54.301,27.813 54.301,25.146 53.764,24.61 C2.2@52.759,24.61 ; U10.7@53.914,45.692 ccw(c55.072,46.85) 55.072,45.212 ; U10.7@54.052,45.212 U10.7@56.55,45.212 ; U10.7@54.339,46.116 ccw(c56.521,48.298) U10.7@56.521,45.212 ; v2@87.446,35.712 89.916,35.712 90.355,36.151 90.355,40.405 89.968,40.792 U14.9@88.893,40.792 ; U14.11@88.893,38.252 90.323,38.252 ; U14.9@89.393,40.767 cw(c89.393,39.32) 90.417,40.343 ; U14.9@89.398,40.768 cw(c89.579,39.829) 90.255,40.505
  Top Layer w0.8: C5.2@19.85,105.78 cw(c20.231,104.77) v2@20.995,105.534 ; C5.2@20.322,105.935 cw(c20.322,105.219) v2(20.828,105.725) ; C3.2@20.752,60.688 20.752,62.064 U8.1@23.749,65.061 ; v2(20.828,106.647) cw(c19.456,107.612) C5.2@19.456,105.935 20.594,105.935 20.923,105.605 R13.1@26.459,105.605 ; v2@23.495,64.807 ccw(c23.004,65.299) U8.1@23.699,65.299 ; U8.1@23.749,65.742 cw(c22.015,65.742) v2(23.241,64.516) ccw(c23.203,65.061) U8.1@23.749,65.061 ; U8.1@23.749,66.599 U8.1@23.749,65.061 ; U2.1@26.484,55.181 ccw(c25.052,56.612) 27.076,56.612 ; U2.1@26.58,55.443 ccw(c25.383,56.641) 27.076,56.641 ; U2.1@27.076,55.06 R24.1@27.076,58.488 30.184,58.488 30.548,58.124 C32.2@31.725,58.124 ; U2.1@27.076,55.714 ccw(c27.815,55.714) U2.1@27.293,55.192 ; R26.1@29.111,59.036 cw(c29.237,58.1) 29.904,58.768 ; R26.1@29.282,58.261 cw(c29.781,57.087) 30.683,57.989 ; v2(31.369,97.231) U11.1@31.369,99.619 ; C7.2@38.618,50.939 v2@38.618,51.829 ; C18.2@45.745,48.201 46.904,48.201 47.65,47.455 48.738,47.455 50.797,49.514 v2(50.797,56.822) ; C18.2@46.08,48.036 cw(c46.08,45.648) C30.1@47.769,47.336 ; C18.2@46.138,48.046 cw(c46.527,46.999) 47.316,47.789 ; 47.222,47.883 ccw(c47.857,48.518) C30.1@48.193,47.685 ; C30.1@48.285,47.703 ccw(c48.285,49.393) 49.481,48.198 ; C23.2@52.731,36.321 R19.1@54.902,36.321 ; U10.7@53.631,43.109 cw(c52.863,42.341) 53.95,42.341 cw(c55.036,42.341) U10.7@54.268,43.109 ; v2(53.721,40.513) ccw(c53.169,41.065) 53.95,41.065 ; v2@53.95,40.431 U10.7@53.95,44.577 ; 53.95,41.954 ccw(c55.988,41.954) v2(54.546,40.513) ; C22.2@61.316,36.321 61.316,36.345 63.462,38.491 63.462,40.395 64.309,41.242 C21.1@70.358,41.242 ; R20.1@63.018,38.047 ccw(c62.545,38.521) R20.1@63.214,38.521 ; L6.1@69.802,38.696 ccw(c68.459,40.039) 70.358,40.039 ; L6.1@70.159,38.696 ccw(c69.678,39.177) 70.358,39.177 ; L6.1@70.334,38.521 v2(71.626,38.521) ; C20.1@70.334,49.055 C28.2@75.192,49.055 ; L6.1@70.358,38.545 C21.1@70.358,41.242 ; C40.2@72.873,41.242 C21.1@70.358,41.242 ; v2@71.672,38.521 ccw(c71.672,39.481) v2(72.351,38.802) cw(c71.672,39.481) v2@71.672,38.521
  Top Layer w1.295: C13.2@40.102,23.501 40.102,24.735 40.456,25.089 C16.2@40.456,26.168 ; C15.2@40.454,28.931 42.774,28.931 43.634,29.791 R16.2@45.81,29.791 ; 40.541,24.61 C33.1@45.81,24.61 ; P12.2@75.184,24.216 L5.1@79.033,24.216 ; P12.2@75.923,23.755 cw(c77.034,22.644) 77.034,24.216 ; P12.2@75.923,24.961 ccw(c77.722,26.76) 77.722,24.216
  other v1: 41.408,36.322 41.408,37.338 26.289,37.719 26.924,38.1 41.408,38.354 26.416,38.608 26.43,41.975 27.346,41.986 37.745,41.975 38.661,41.986 26.43,42.864 27.346,42.875 37.745,42.864 38.661,42.875 26.43,43.753 27.346,43.764 37.745,43.753 38.661,43.764 26.43,44.642 27.346,44.653 37.745,44.642 38.661,44.653 31.623,47.879 16.129,48.387 16.764,48.387 17.526,48.387 31.623,48.692 15.748,49.022 16.468,49.022 17.187,49.022 17.907,49.022 31.623,49.505 15.754,49.784 16.514,49.784 17.274,49.784 18.034,49.784 31.623,50.317 30.988,50.673 31.623,51.13 30.988,51.435 31.623,51.943 26.43,52.567 27.346,52.578 26.43,53.456 27.346,53.467 46.99,53.975 26.43,54.345 27.346,54.356 46.99,54.991 26.43,55.234 27.346,55.245 46.99,56.007 46.99,57.023
  other v2: 44.323,24.61 54.301,25.4 54.301,26.416 44.45,29.791 43.434,29.845 68.961,30.734 69.977,30.734 70.866,30.734 87.404,35.706 53.829,36.321 73.065,38.62 55.372,40.513 38.618,51.871 21.776,63.102 21.336,63.881 21.971,64.516 22.606,65.151 22.733,67.818 34.29,97.282 33.274,97.663 34.29,98.203 33.274,98.637 34.29,99.123 33.274,99.61 34.29,100.044 33.274,100.584 34.29,100.965 23.114,105.605 25.402,105.605 23.114,106.587 25.4,106.587 20.828,107.569 23.114,107.569 25.4,107.569
GND2: C4.2 C6.2 C8.2 C9.2 C11.2 C35.1 C36.2 C37.1 C38.2 C39.1 C42.2 C45.1 D1.1 D5.2 L5.2 P6.3 P10.6 P11.4 pad.0 R35.1 U7.11 U7.32 U7.62 U7.81 U7.99 U14.15 U15.2 U19.9 U19.11 U19.13 U19.15 | length 432.5
  Top Layer w0.28: C35.1@117.624,81.269 cw(c116.757,80.402) 117.983,80.402 cw(c119.209,80.402) C35.1@118.342,81.269 ; v1@117.852,79.884 ccw(c117.536,80.2) 117.983,80.2 ccw(c118.43,80.2) v1@118.114,79.884 ; v1(117.983,79.753) C35.1@117.983,81.628 118.411,81.628 119.459,82.676 ; C35.1@117.998,81.855 ccw(c118.086,83.177) 119.023,82.24 ; C35.1@118.017,82.134 ccw(c118.141,83.995) 119.459,82.676 ; U7.62@120.717,82.676 119.459,82.676 ; U15.2@124.282,62.677 U15.2@124.282,63.4 ; C39.1@124.282,68.318 125.198,68.318 ; C39.1@124.713,68.049 cw(c125.198,67.746) 125.198,68.318 ; C39.1@124.713,68.587 ccw(c125.198,68.891) 125.198,68.318 ; U7.81@124.767,74.626 124.767,72.332 125.537,71.562 125.537,68.657 125.198,68.318 ; D1.1@128.778,68.151 130.604,68.151 131.052,67.703 132.854,67.703 134.239,69.088 136.906,69.088 ; U7.32@131.267,89.726 131.267,88.295 v1(131.848,87.714) ; v1@131.663,87.714 ccw(c131.216,87.714) 131.532,88.029 ccw(c131.848,88.345) v1@131.848,87.899 ; U7.99@133.767,74.626 133.767,72.537 134.483,71.821 136.737,71.821 137.346,71.212 ; C4.2@133.939,100.573 v1@134.863,100.573 ; U7.11@135.817,81.176 137.384,81.176 138.571,82.363 C11.2@138.571,82.557 ; C9.2@137.053,70.688 ccw(c136.73,71.212) 137.346,71.212 ; C9.2@137.346,70.256 137.346,71.212 ; C9.2@137.622,70.665 cw(c138.026,71.212) 137.346,71.212 ; 137.88,81.672 ccw(c136.682,82.87) C11.2@138.376,82.87 ; 138.349,82.141 cw(c138.884,81.605) C11.2@138.884,82.362 ; 138.358,82.15 ccw(c137.638,82.87) C11.2@138.656,82.87 ; C11.2@138.676,82.449 C11.2@138.676,82.533
  Top Layer w0.5: v1(123.349,47.625) 123.865,47.109 R35.1@125.171,47.109
  Top Layer w0.6: U14.15@88.893,33.172 91.592,33.172 93.862,35.442 93.862,50.387 94.371,50.896 U19.15@95.393,50.896 ; 93.862,43.276 U19.9@95.393,43.276 ; 93.862,49.684 cw(c95.439,49.684) v2@94.324,50.799 ; 93.862,50.248 cw(c94.401,50.248) v2@94.276,50.773 ; 93.89,45.816 U19.11@95.393,45.816 ; 93.891,48.356 U19.13@95.393,48.356 ; 93.959,50.484 cw(c94.893,49.551) U19.15@94.893,50.871 ; 94.018,50.543 ccw(c93.69,50.87) v2@94.153,50.87 ; v2@94.11,50.635 cw(c94.721,50.025) U19.15@94.888,50.872
  Top Layer w0.8: v2(127.208,93.345) C8.2@127.208,94.572 ; v2(133.888,93.572) C6.2@133.888,94.572 ; C11.2@138.884,82.87 v2(138.884,85.605)
  Top Layer w1: v3@118.11,93.853 118.653,94.396 C42.2@118.653,96.876 ; D5.2@119.507,67.386 122.138,67.386 123.07,68.318 C39.1@124.282,68.318 ; D5.2@120.209,66.976 cw(c121.198,65.987) 121.198,67.386 cw(c121.198,68.785) D5.2@120.209,67.796 ; 115.723,57.856 115.723,102.615 141.525,102.615 141.525,57.856 115.723,57.856
  Top Layer w1.295: L5.2@81.233,24.216 v4(82.232,24.216) ; U15.2@122.688,64.059 ccw(c118.839,67.908) C39.1@124.282,67.908 ; U15.2@124.282,63.4 C39.1@124.282,68.318 ; C39.1@124.282,67.755 ccw(c129.509,67.755) U15.2@125.813,64.059 ; U15.2@124.758,62.497 v3(132.57,62.497) ; U15.2@126.829,60.934 cw(c130.601,57.162) 130.601,62.497 cw(c130.601,67.832) U15.2@126.829,64.059 ; C45.1@137.346,67.996 cw(c136.723,67.373) C45.1@137.603,67.373 ; C9.2@137.346,70.281 137.346,67.943 137.603,67.685 137.603,61.214 ; C45.1@137.458,67.83 cw(c136.51,66.882) v2@137.851,66.882 ; C37.1@137.244,60.249 cw(c138.479,60.339) 137.603,61.214 ; C37.1@137.244,60.249 ccw(c136.376,61.116) 137.603,61.116 cw(c136.376,61.116) C37.1@137.244,60.249 ; C37.1@137.244,60.249 137.244,60.855 137.603,61.214
  MidLayer2 w0.6: v2@139.92,76.04 P11.4@145.631,76.04 ; P11.4@145.313,75.721 ccw(c144.545,74.953) 144.545,76.04 ccw(c144.545,77.126) P11.4@145.313,76.358
  MidLayer2 w1.295: v4(82.232,24.216) 107.724,24.216 117.207,33.699 117.207,41.546 137.603,61.942 v4(137.603,63.981)
  Bottom Layer w0.6: v2(94.253,50.87) 96.956,50.87 100.792,47.034 100.792,29.184 102.489,27.487 v2(102.489,24.216) ; P6.3@139.79,51.628 144.138,51.628 145.631,53.121 P11.4@145.631,76.04 ; P6.3@140.108,51.31 cw(c140.876,50.542) 140.876,51.628 cw(c140.876,52.715) P6.3@140.108,51.947 ; P11.4@145.313,75.721 cw(c144.545,74.953) 145.631,74.953 cw(c146.717,74.953) P11.4@145.949,75.721
  other v1: 134.874,100.584
  other v2: 126.09,57.856 127.756,57.856 137.787,57.856 139.453,57.856 141.525,59.312 141.525,62.992 141.525,66.672 137.603,66.882 137.346,69.178 115.723,70.352 141.525,70.352 141.525,74.032 139.92,76.025 115.723,77.712 141.525,77.712 115.723,81.393 141.525,81.393 115.723,85.073 141.525,85.073 115.723,88.753 141.525,88.753 115.723,92.433 115.723,96.113 115.723,99.793 141.525,99.793 117.676,102.615 121.929,102.615 126.181,102.615 130.434,102.615 134.687,102.615
  other v3: 118.11,93.904
IN1: R14.2 R39.2 U14.14 | length 128.9
  Top Layer w0.28: R14.2@31.144,105.246 cw(c32.011,104.38) 32.011,105.605 cw(c32.01,106.831) R14.2@31.144,105.964 ; R14.2@31.246,105.605 v1(35.419,105.605) ; v1@35.288,105.475 ccw(c34.972,105.159) 34.972,105.605 ccw(c34.972,106.052) v1@35.288,105.736 ; R39.2@86.089,34.654 ccw(c86.601,35.166) 86.601,34.442 ; R39.2@86.245,34.442 U14.14@88.893,34.442 ; R39.2@86.287,34.134 cw(c87.031,33.391) v2@87.031,34.442 ; R39.2@86.287,34.852 ccw(c87.277,35.842) v2@87.277,34.442 ; 86.751,34.442 cw(c86.751,33.793) v2@87.21,34.252 ; 86.781,34.442 ccw(c86.781,35.049) v2@87.21,34.62 ; v2@87.578,34.252 cw(c88.037,33.793) 88.037,34.442 ; v2@87.578,34.62 ccw(c88.007,35.049) 88.007,34.442 ; U14.14@88.262,34.311 ccw(c87.947,33.996) 87.947,34.442 ccw(c87.947,34.889) U14.14@88.262,34.573
  Bottom Layer w0.28: v1@35.288,105.475 cw(c34.972,105.159) 35.419,105.159 cw(c35.866,105.159) v1@35.55,105.475 ; v1(35.419,105.605) 35.419,57.866 51.162,42.123 85.095,42.123 86.526,40.692 86.526,35.304 v2(87.394,34.436) ; v2@87.134,34.436 ccw(c86.506,34.436) 86.95,34.88 ccw(c87.394,35.324) v2@87.394,34.696
IN2: R30.1 R55.2 U14.10 | length 92.7
  Top Layer w0.28: R30.1@22.501,58.129 cw(c21.634,57.263) 22.86,57.263 cw(c24.086,57.263) R30.1@23.219,58.129 ; v1@22.729,57.346 ccw(c22.413,57.662) 22.86,57.662 ccw(c23.307,57.662) v1@22.991,57.346 ; v1(22.86,57.215) R30.1@22.86,58.488 ; R55.2@80.313,42.745 81.624,42.745 84.846,39.523 v2(85.714,39.523) ; R55.2@80.672,42.386 cw(c81.539,41.52) 81.539,42.745 cw(c81.539,43.971) R55.2@80.672,43.104 ; v2@85.53,39.339 ccw(c85.086,38.895) 85.086,39.523 ccw(c85.086,40.151) v2@85.53,39.707 ; v2(85.714,39.523) U14.10@88.893,39.522 ; v2@85.898,39.339 cw(c86.34,38.897) 86.34,39.522 ; v2@85.898,39.707 ccw(c86.344,40.153) 86.344,39.522 ; U14.10@88.262,39.391 ccw(c87.947,39.076) 87.947,39.522 ccw(c87.947,39.969) U14.10@88.262,39.653
  MidLayer2 w0.28: v1(22.86,57.215) 23.806,57.215 24.422,56.599 32.038,56.599 32.374,56.935 v1(35.349,56.935) ; v1@22.991,57.084 cw(c23.307,56.768) 23.307,57.215 cw(c23.307,57.662) v1@22.991,57.346 ; v1@35.218,56.804 ccw(c34.902,56.488) 34.902,56.935 ccw(c34.902,57.382) v1@35.218,57.066
  Bottom Layer w0.28: v1@35.345,56.932 50.636,41.641 84.884,41.641 85.714,40.811 v2(85.714,39.523) ; v1@35.349,56.75 cw(c35.349,56.32) 35.653,56.624 ; v1@35.534,56.935 ccw(c35.998,56.935) 35.67,56.607 ; v2@85.53,39.707 ccw(c85.086,40.151) 85.714,40.151 ccw(c86.342,40.151) v2@85.898,39.707